# Allegro board ARTNET_NODE_2.brd
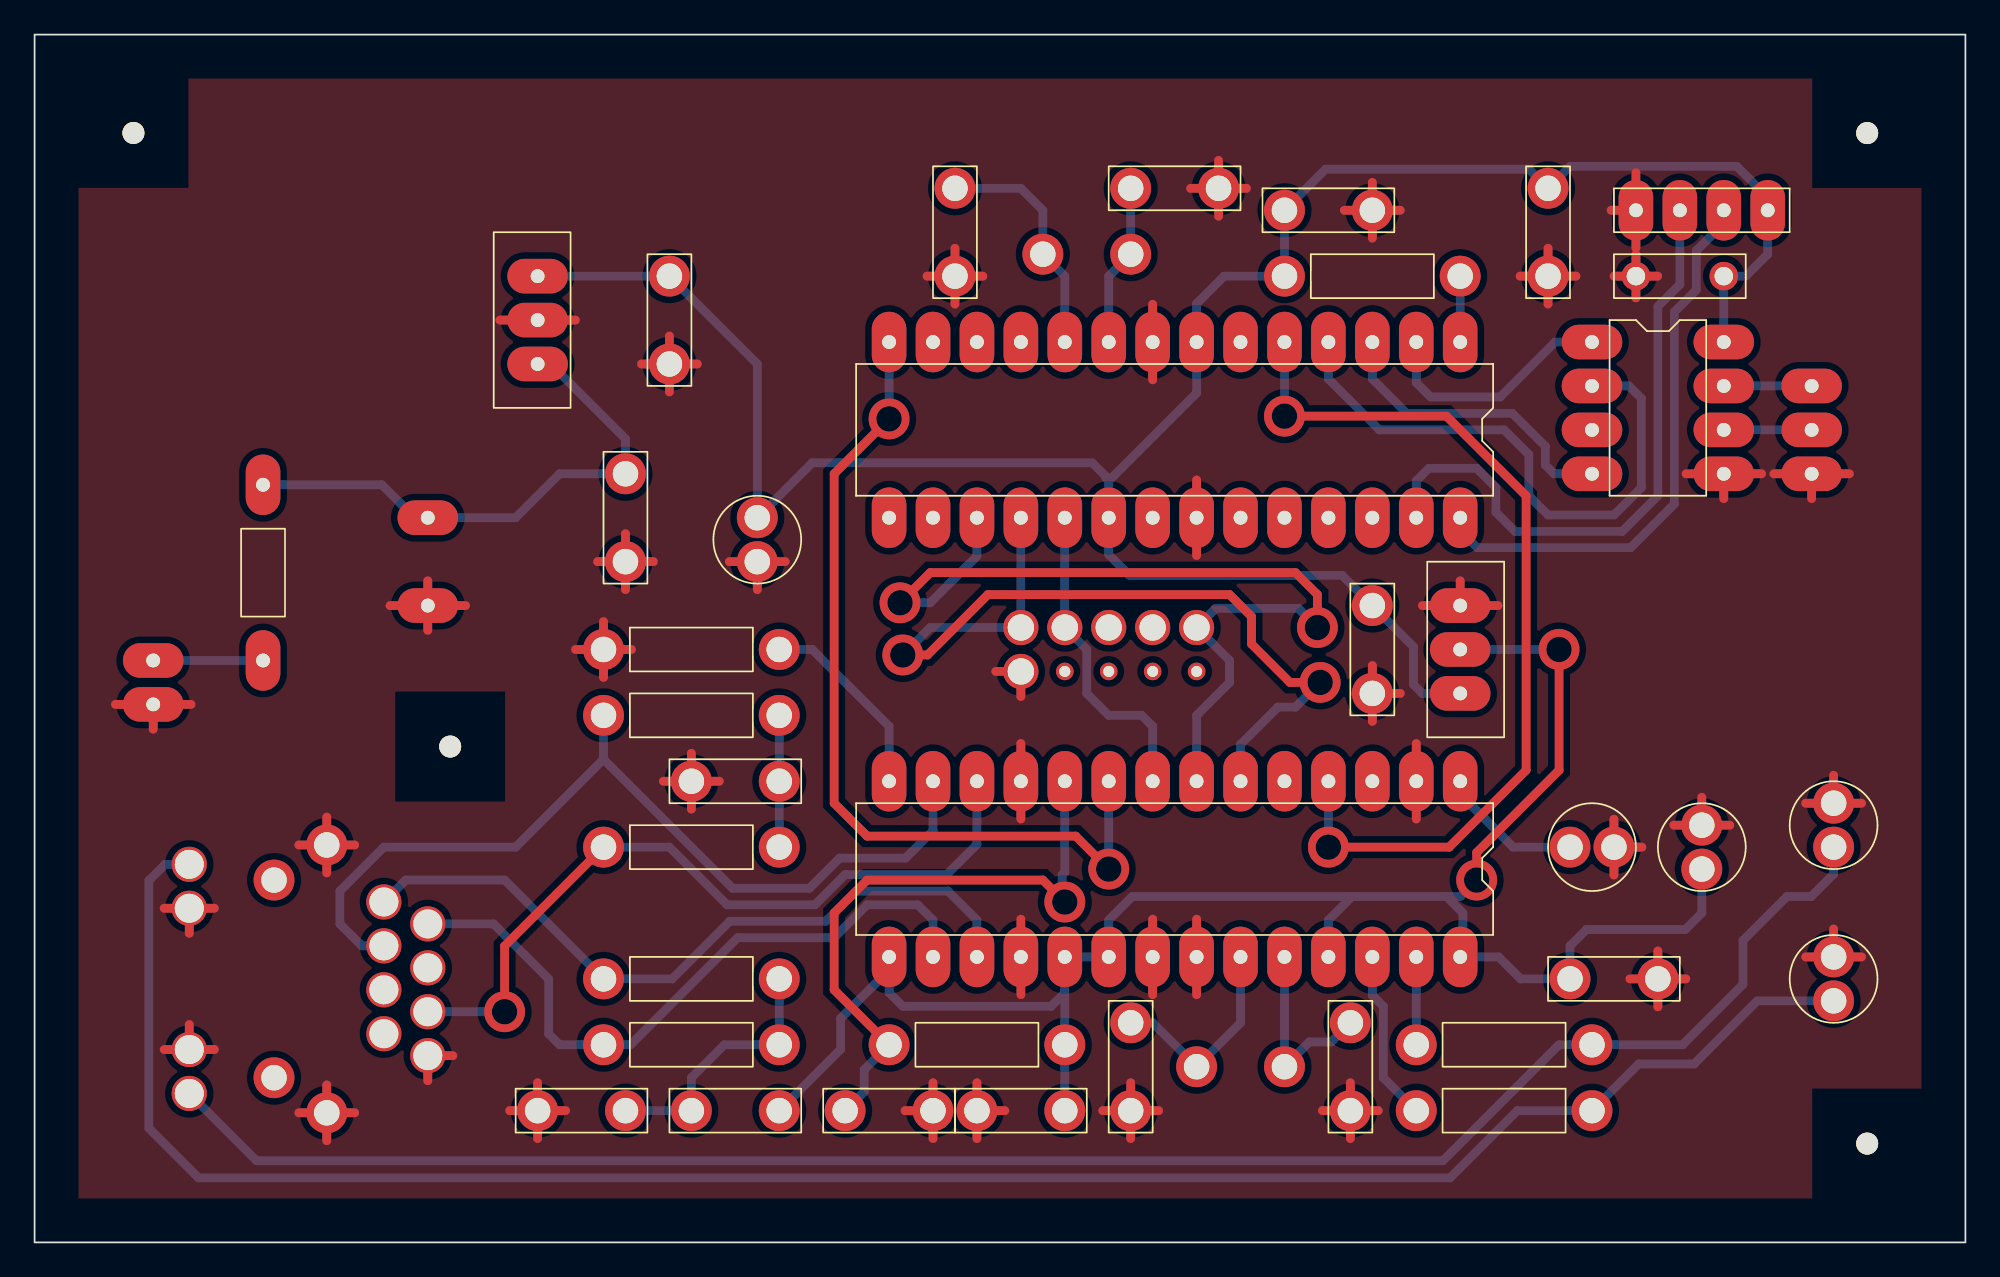
[diagram p0: board, top side]
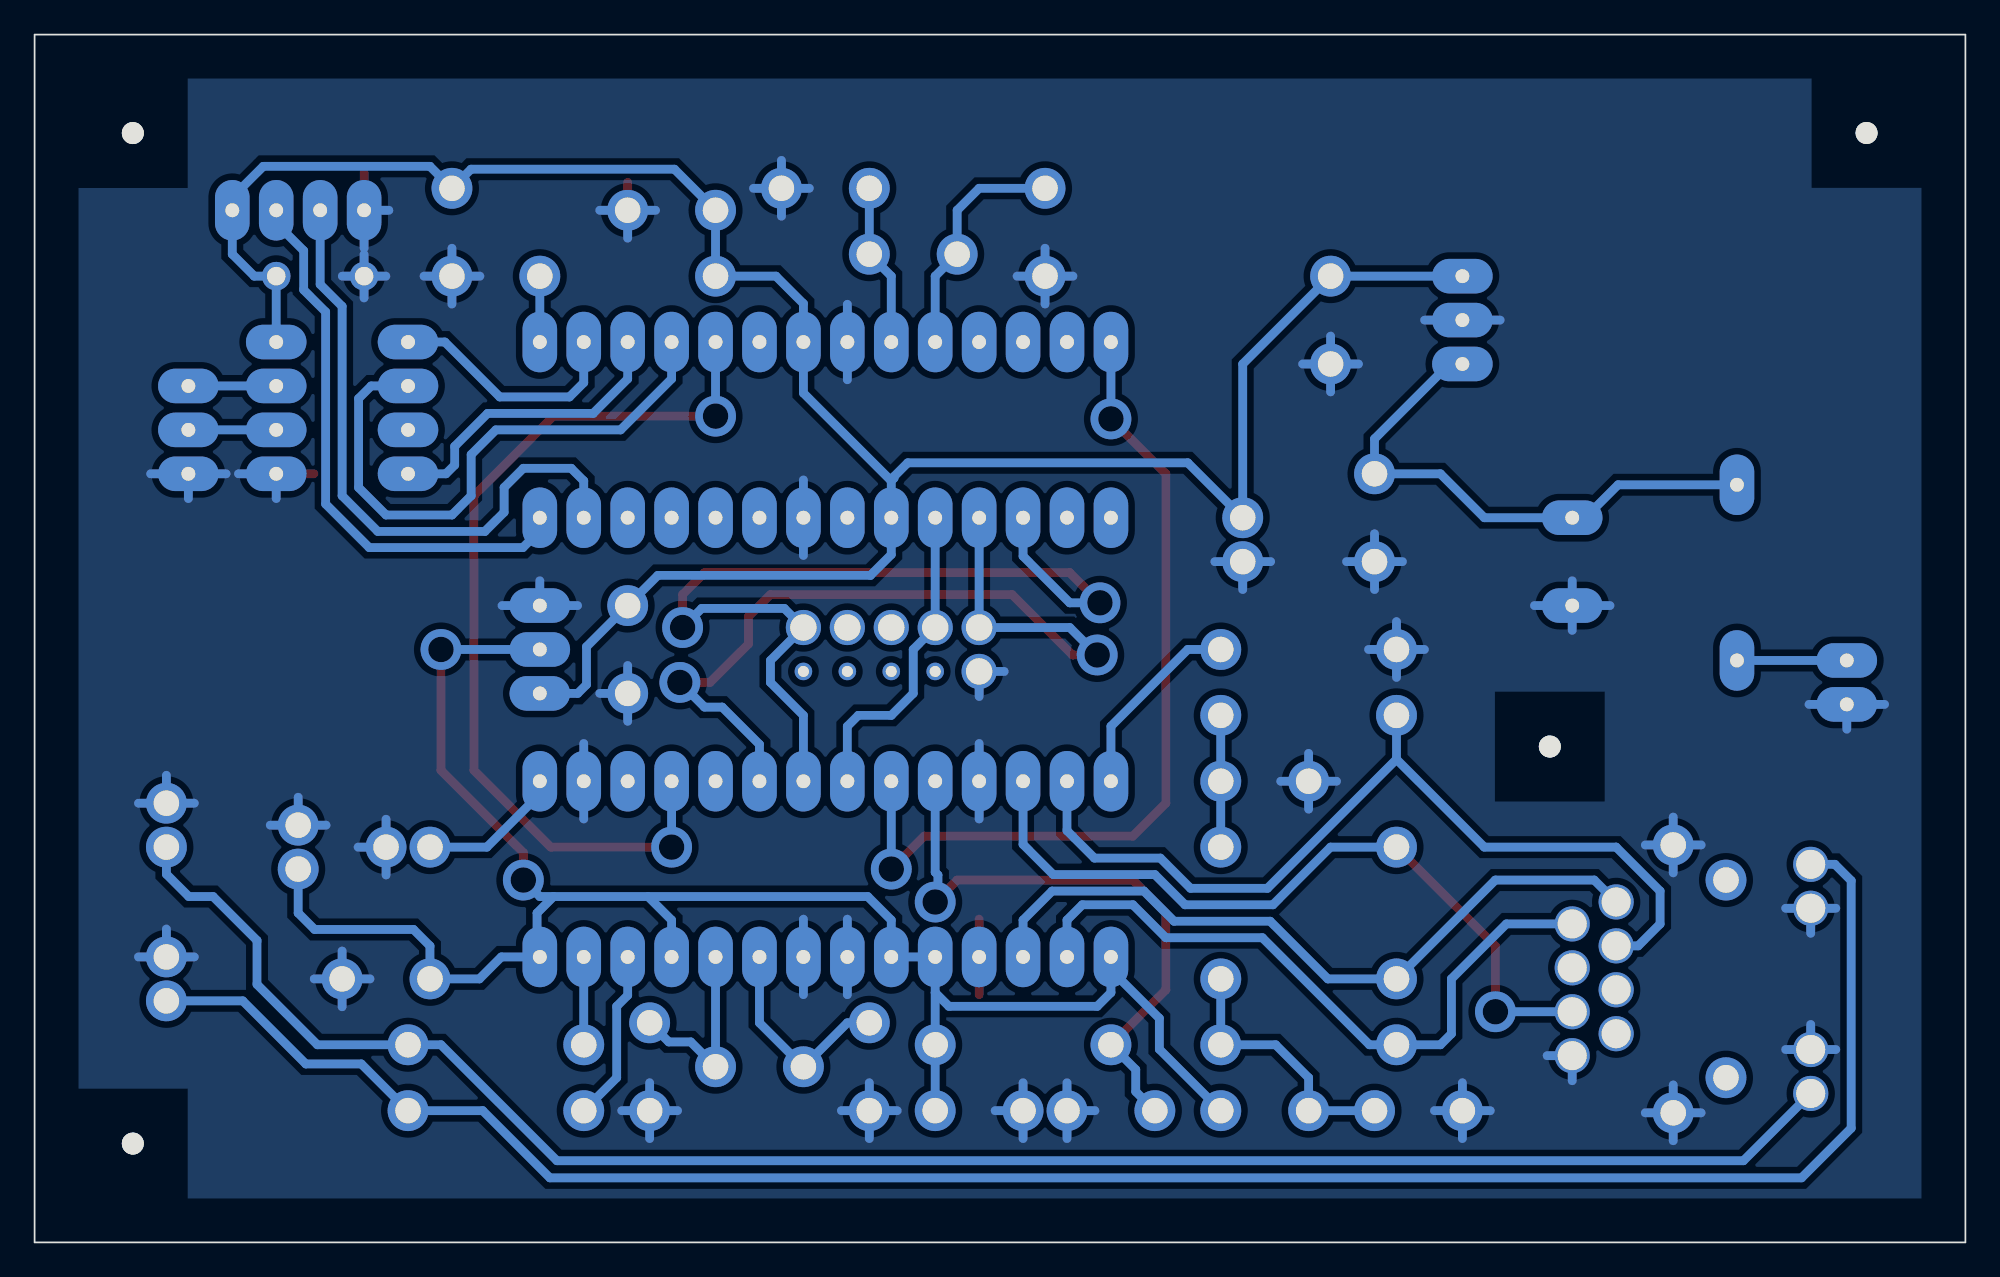
[diagram p1: board, bottom side, seen from below]

Outline 111.63 x 69.85 mm; copper layers: TOP, BOTTOM. Coordinates in mm from the lower left corner of the outline.
Outline path: rectangle 0,0 111.63,69.85

## Design rules (mm)
nets with their own width: min track width 0.508; nets DIR_IO ETH_CS ETH_INT GND MISO MOSI N23309 N23328 N23388 N23750 N23827 N23987 N24551 N24563 N24954 N24961 N25009 N25013 N26007 N26198 N27240 N28731 N29274 N29288 N30528 N30541 RESET RXD SCK TPIN+ TPIN- TPOUT+ TPOUT- TXD VCC_3V VCC_5V

## Placement (name value [footprint] x y rotation side)
C1  22p  [CAPCK06]  68.45 60.96 90 top
C2  22p  [CAPCK06]  53.21 55.88 0 top
C3  10u  [CAP196]  41.78 41.91 180 top
C4  100n  [CAPCK06]  87.5 55.88 0 top
C5  10u  [CAP196]  96.39 21.59 0 top
C6  10u  [CAP196]  88.77 22.86 270 top
C7  100n  [CAPCK06]  77.34 31.75 0 top
C11  220u  [CAP500]  22.73 39.37 270 top
C14  100n  [CAPCK06]  54.48 7.62 270 top
C15  100n  [CAPCK06]  36.7 50.8 0 top
C16  100n  [CAPCK06]  34.16 39.37 0 top
C17  22p  [CAPCK06]  63.37 12.7 180 top
C18  22p  [CAPCK06]  76.07 12.7 180 top
C22  10n  [CAPCK06]  37.97 26.67 270 top
C23  10n  [CAPCK06]  29.08 7.62 270 top
C24  100n  [CAPCK06]  51.94 7.62 90 top
C25  100n  [CAPCK06#2]  92.58 55.88 270 top
C26  100n  [CAPCK06]  77.34 59.69 90 top
C27  100n  [CAPCK06]  93.85 15.24 90 top
D1  1N4004  [DIO400]  13.21 43.81 180 top
J1  CON1  [RJ45]  13.84 15.24 90 top
J2  CON2  [FGCON3_1]  102.74 46.99 270 top
J3  CON3  [FGCON2_1]  6.86 32.38 270 top
J4  CON10  [FGCON10]  62.1 34.29 180 top
JP1  CON4  [JUMPER4]  92.58 59.69 0 top
L1  INDUCTOR  [CAPCK06]  43.05 7.62 90 top
LED2  LED  [CAP196]  104.01 25.4 180 top
LED3  LED  [CAP196]  104.01 16.51 180 top
NOREF  -  [unnamed]  105.95 64.15 0 top
NOREF#2  -  [unnamed]  24.03 28.68 0 top
NOREF#3  -  [unnamed]  5.71 64.16 0 top
NOREF#4  -  [unnamed]  105.95 5.72 0 top
R1  10k  [RES400]  72.26 55.88 270 top
R5  10k  [RES400]  59.56 11.43 90 top
R6  180  [RES400]  79.88 11.43 270 top
R7  180  [RES400]  79.88 7.62 270 top
R8  2k7  [RES400]  43.05 34.29 90 top
R9  47  [RES400]  32.89 30.48 270 top
R10  47  [RES400]  32.89 22.86 270 top
R11  47  [RES400]  43.05 15.24 90 top
R12  47  [RES400]  43.05 11.43 90 top
U1  Atmega328  [DIP28_4]  82.42 52.07 270 top
U2  LM7805/TO  [TO220AB]  29.08 50.8 270 top
U3  LM7833/TO  [TO220AB]  82.42 36.83 90 top
U4  75176  [DIP8_3]  90.04 52.07 0 top
U5  ENC28J60-DIL  [DIP28_4]  82.42 26.67 270 top
Y1  20MHz  [CRYS11MHZ]  58.29 57.15 0 top
Y2  25MHz  [CRYS11MHZ]  72.26 10.16 180 top

## Library data of the parts
C1 C2 C4 C7 C14-C18 C22-C27 = CAP NP: Tolerance: ***; User Part Number: ***
C3 C5 C6 = CAP: Tolerance: ***; User Part Number: ***
C11 = CAP
D1 = DIODE
J1 = CON16
J2 = CON3
J3 = CON2
J4 = CON10
JP1 = CON4: User Part Number: ***
L1 = INDUCTOR: Tolerance: ***; User Part Number: ***
LED2 LED3 = LED: Tolerance: ***; User Part Number: ***
R1 R5-R12 = RESISTOR: Tolerance: ***; User Part Number: ***
U1 = Atmega88_0: Tolerance: XXX; User Part Number: XXX
U2 = LM7805/TO_1
U3 = LM7805/TO_2
U4 = 75176_0: Tolerance: ***; User Part Number: ***
U5 = ENC28J60-DIL: Tolerance: XXX; User Part Number: XXX
Y1 Y2 = CRYSTAL: Tolerance: ***; User Part Number: ***

## Footprints (pads in the part's own frame, mm; a bottom-side part is the same pattern mirrored in y, then rotated)
CAP196
  round 2.362 hole 1.473: 1(0,0) 2(0,2.54)
CAP500
  oval 2x3.5 hole 0.8: 1(-2.54,0) 2(2.54,0)
CAPCK06
  round 2.362 hole 1.473: 1(0,0) 2(0,5.08)
CAPCK06#2
  round 1.651 hole 1.067: 1(0,0) 2(0,5.08)
CRYS11MHZ
  round 2.362 hole 1.473: 1(0,0) 2(5.08,0)
DIO400
  oval 2x3.5 hole 0.8: 1(0,0) 2(0,10.16)
DIP8_3
  oval 3.5x2 hole 0.8: 1(0,0) 2(0,-2.54) 3(0,-5.08) 4(0,-7.62) 5(7.62,-7.62) 6(7.62,-5.08) 7(7.62,-2.54) 8(7.62,0)
DIP28_4
  oval 3.5x2 hole 0.8: 1(0,0) 2(0,-2.54) 3(0,-5.08) 4(0,-7.62) 5(0,-10.16) 6(0,-12.7) 7(0,-15.24) 8(0,-17.78) 9(0,-20.32) 10(0,-22.86) 11(0,-25.4) 12(0,-27.94) 13(0,-30.48) 14(0,-33.02) 15(10.16,-33.02) 16(10.16,-30.48) 17(10.16,-27.94) 18(10.16,-25.4) 19(10.16,-22.86) 20(10.16,-20.32) 21(10.16,-17.78) 22(10.16,-15.24) 23(10.16,-12.7) 24(10.16,-10.16) 25(10.16,-7.62) 26(10.16,-5.08) 27(10.16,-2.54) 28(10.16,0)
FGCON2_1
  oval 2x3.5 hole 0.8: 1(-1.27,0) 2(1.27,0)
FGCON3_1
  oval 2x3.5 hole 0.8: 1(-2.54,0) 2(0,0) 3(2.54,0)
FGCON10
  round 2.032 hole 1.524: 1(-5.08,-1.27) 3(-2.54,-1.27) 5(0,-1.27) 7(2.54,-1.27) 9(5.08,-1.27) 10(5.08,1.27)
  round 1.016 hole 0.635: 2(-5.08,1.27) 4(-2.54,1.27) 6(0,1.27) 8(2.54,1.27)
JUMPER4
  oval 2x3.5 hole 0.8: 1(0,0) 2(2.54,0) 3(5.08,0) 4(7.62,0)
RES400
  round 2.362 hole 1.473: 1(0,0) 2(0,10.16)
RJ45
  round 2.032 hole 1.676: 1(4.45,-6.35) 2(3.18,-8.89) 3(1.91,-6.35) 4(0.64,-8.89) 5(-0.63,-6.35) 6(-1.9,-8.89) 7(-3.17,-6.35) 8(-4.44,-8.89) 9(6.625,4.9) 10(4.085,4.9) 11(-4.085,4.9) 12(-6.625,4.9)
  round 2.362 hole 1.473: 13(-7.745,-3.05) 14(7.745,-3.05) 15(-5.715,0) 16(5.715,0)
TO220AB
  oval 2x3.5 hole 0.8: 1(0,0) 2(-2.54,0) 3(-5.08,0)
unnamed
  round 1.27 hole 3.962 unplated: (0,0)

## Nets
GND: C1.1 C2.1 C3.2 C4.1 C5.2 C6.2 C7.1 C11.2 C14.1 C15.1 C16.1 C17.2 C18.2 C22.1 C23.1 C24.1 C25.1 C26.1 C27.1 J1.8 J1.10 J1.11 J1.13 J1.14 J2.3 J3.2 J4.10 JP1.1 LED2.1(CATHODE) LED3.1(CATHODE) R8.2 U1.8(GND0) U1.22(GND1) U2.2(GND) U3.1(GND) U4.5(GND) U5.2(VSS) U5.11(VSSRX) U5.18(VSSTX) U5.21(VSSPLL) U5.22(VSSOSC)
VCC_3V: C5.1 C14.2 C27.2 L1.1 R5.1 U3.2(VOUT) U5.15(VDDTX) U5.19(VDDRX) U5.20(VDDPLL) U5.25(VDDOSC) U5.28(VDD)
VCC_5V: C3.1 C4.2 C7.2 C15.2 C25.2 C26.2 JP1.4 R1.1 U1.7(VCC0) U1.20(AVCC) U2.3(VOUT) U3.3(VIN) U4.8(VCC)
DIR_IO: U1.4(PD2 (INT0)) U4.2(RE) U4.3(DE)
ETH_CS: U1.14(PB0) U5.9(CS)
ETH_INT: U1.5(PD3 (OC2B)) U5.4(INT)
MISO: J4.9 U1.18(PB4 (MISO)) U5.6(SO)
MOSI: J4.1 U1.17(PB3 (MOSI)) U5.7(SI)
RESET: J4.5
RXD: U1.2(PD0 (RXD)) U4.1(R)
SCK: J4.7 U1.19(PB5 (SCK)) U5.8(SCK)
TPIN+: J1.3 R9.1 U5.13(TPIN+)
TPIN-: J1.6 R10.1 U5.12(TPIN-)
TPOUT+: J1.1 R11.2 U5.17(TPOUT+)
TPOUT-: J1.2 R12.2 U5.16(TPOUT-)
TXD: U1.3(PD1 (TXD)) U4.4(D)
N23309: C1.2 U1.9(PB6 (XTAL1)) Y1.2
N23328: C2.2 U1.10(PB7 (XTAL2)) Y1.1
N23388: R1.2 U1.1(PC6 (RESET))
N23750: R8.1 U5.14(RBIAS)
N23827: C24.2 R5.2 U5.10(RESET)
N23987: C6.1 U5.1(VCAP)
N24551: C17.1 U5.23(OSC1) Y2.2
N24563: C18.1 U5.24(OSC2) Y2.1
N24954: R6.1 U5.27(LEDA)
N24961: R7.1 U5.26(LEDB)
N25009: J1.12 LED2.2(ANODE) R6.2
N25013: J1.9 LED3.2(ANODE) R7.2
N26007: C22.2 R9.2 R10.2
N26198: C23.2 L1.2 R11.1 R12.1
N27240: C11.1 C16.2 D1.1(K) U2.1(VIN)
N28731: D1.2(A) J3.1
N29274: J2.2 U4.6(A)
N29288: J2.1 U4.7(B)
N30528: JP1.3 U1.28(PC5 (ADC5))
N30541: JP1.2 U1.27(PC4 (ADC4))

Pads without a net: J1 4 5 7 15 16; J4 2 3 4 6 8; U1 6 11 12 13 15 16 21 23 24 25 26; U5 3 5

## Via types
v1: diameter 2.362, hole 1.473, TOP to BOTTOM, 12 vias
v2: diameter 0.61, hole 0.33, TOP to BOTTOM, 1 via

## Routing (per net, layer and track width the routed paths; a pad name or vN(x,y) marks a point on that pad's centre or on a via; arc(x,y) is an arc through that point)
GND: length 429
  TOP w0.508: 74.46,7.62 C18.2 ; C18.2 76.07,9.23 ; C18.2 77.69,7.62 ; C18.2 76.07,6.01 ; C16.1 34.16,40.98 ; C16.1 32.55,39.37 ; C16.1 34.16,37.76 ; C16.1 35.78,39.37 ; C15.1 36.7,52.41 ; C15.1 38.32,50.8 ; C15.1 36.7,49.19 ; C15.1 35.09,50.8 ; 31.28,34.29 R8.2 ; R8.2 32.89,32.68 ; R8.2 34.51,34.29 ; R8.2 32.89,35.9 ; 55.58,33.02 J4.10 57.02,31.57 ; 6.86,29.68 J3.2 ; J3.2 9.04,31.12 ; J3.2 4.68,31.12 ; C25.1 92.58,57.14 ; C25.1 93.84,55.88 ; C25.1 91.33,55.88 ; C25.1 92.58,54.62 ; 27.47,7.62 C23.1 ; C23.1 30.7,7.62 ; C23.1 29.08,6.01 ; C23.1 29.08,9.23 ; JP1.1 92.58,61.87 ; JP1.1 92.58,57.51 ; JP1.1 91.15,59.69 ; 80.24,36.83 U3.1 ; U3.1 84.6,36.83 ; U3.1 82.42,38.26 ; 79.88,28.85 U5.2 79.88,24.49 ; 64.64,54.25 U1.8 64.64,49.89 ; J1.14 18.51,22.98 ; J1.14 15.28,22.98 ; J1.14 16.89,24.6 ; J1.14 16.89,21.37 ; 57.02,18.69 U5.18 57.02,14.33 ; J1.10 10.39,19.33 ; J1.10 7.5,19.33 ; J1.10 8.94,17.88 ; 102.4,16.51 LED3.1 ; LED3.1 104.01,18.12 ; LED3.1 105.63,16.51 ; C24.1 51.94,9.23 ; C24.1 50.33,7.62 ; C24.1 51.94,6.01 ; 41.78,37.76 C3.2 ; C3.2 40.17,39.37 ; C3.2 43.4,39.37 ; LED2.1 104.01,27.01 ; LED2.1 105.63,25.4 ; LED2.1 102.4,25.4 ; J1.11 8.94,12.6 ; J1.11 7.5,11.15 ; J1.11 10.39,11.15 ; C17.2 63.37,9.23 ; C17.2 61.76,7.62 ; C17.2 64.99,7.62 ; C17.2 63.37,6.01 ; 87.5,54.27 C4.1 ; C4.1 87.5,57.49 ; C4.1 89.12,55.88 ; C4.1 85.89,55.88 ; 67.18,14.33 U5.22 67.18,18.69 ; 22.73,35.4 C11.2 ; C11.2 24.91,36.83 ; C11.2 20.55,36.83 ; C11.2 22.73,38.26 ; 92.24,15.24 C27.1 ; C27.1 95.47,15.24 ; C27.1 93.85,13.63 ; C27.1 93.85,16.85 ; 54.48,6.01 C14.1 ; C14.1 54.48,9.23 ; C14.1 56.1,7.62 ; 22.73,9.35 J1.8 24.18,10.8 ; 64.64,14.33 U5.21 64.64,18.69 ; U4.5 99.84,44.45 ; U4.5 95.48,44.45 ; U4.5 97.66,43.02 ; C1.1 68.45,62.57 ; C1.1 66.84,60.96 ; C1.1 70.07,60.96 ; C1.1 68.45,59.35 ; 53.21,54.27 C2.1 ; C2.1 51.6,55.88 ; C2.1 53.21,57.49 ; C2.1 54.83,55.88 ; 37.97,25.06 C22.1 ; C22.1 36.36,26.67 ; C22.1 39.59,26.67 ; C22.1 37.97,28.28 ; C7.1 77.34,33.36 ; C7.1 78.96,31.75 ; C7.1 77.34,30.14 ; 102.74,43.02 J2.3 ; J2.3 100.56,44.45 ; J2.3 104.92,44.45 ; J1.13 18.51,7.5 ; J1.13 16.89,5.88 ; J1.13 16.89,9.11 ; J1.13 15.28,7.5 ; 77.34,58.08 C26.1 ; C26.1 75.73,59.69 ; C26.1 77.34,61.3 ; C26.1 78.96,59.69 ; 26.9,53.34 U2.2 31.26,53.34 ; C5.2 96.39,25.74 ; C5.2 98.01,24.13 ; C5.2 94.78,24.13 ; C6.2 92.93,22.86 ; C6.2 91.31,24.47 ; C6.2 91.31,21.25 ; 57.02,28.85 U5.11 57.02,24.49 ; 67.18,39.73 U1.22 67.18,44.09
  BOTTOM w0.508: 68.45,59.35 C1.1 ; C1.1 70.07,60.96 ; C1.1 68.45,62.57 ; C1.1 66.84,60.96 ; 51.6,55.88 C2.1 ; C2.1 53.21,54.27 ; C2.1 53.21,57.49 ; C2.1 54.83,55.88 ; U3.1 82.42,38.26 ; U3.1 80.24,36.83 ; U3.1 84.6,36.83 ; C14.1 54.48,9.23 ; C14.1 56.1,7.62 ; C14.1 54.48,6.01 ; 92.58,54.62 C25.1 ; C25.1 92.58,57.14 ; C25.1 91.33,55.88 ; C25.1 93.84,55.88 ; LED3.1 105.63,16.51 ; LED3.1 104.01,18.12 ; LED3.1 102.4,16.51 ; 57.02,31.57 J4.10 55.58,33.02 ; 57.02,28.85 U5.11 57.02,24.49 ; 99.84,44.45 U4.5 97.66,43.02 ; LED2.1 105.63,25.4 ; LED2.1 104.01,27.01 ; LED2.1 102.4,25.4 ; 67.18,44.09 U1.22 67.18,39.73 ; 27.47,7.62 C23.1 ; C23.1 29.08,6.01 ; C23.1 30.7,7.62 ; C23.1 29.08,9.23 ; 6.86,29.68 J3.2 ; J3.2 9.04,31.12 ; J3.2 4.68,31.12 ; 31.28,34.29 R8.2 ; R8.2 32.89,32.68 ; R8.2 32.89,35.9 ; R8.2 34.51,34.29 ; 16.89,21.37 J1.14 ; J1.14 18.51,22.98 ; J1.14 16.89,24.6 ; J1.14 15.28,22.98 ; 77.34,58.08 C26.1 ; C26.1 75.73,59.69 ; C26.1 78.96,59.69 ; 20.55,36.83 C11.2 ; C11.2 22.73,35.4 ; C11.2 22.73,38.26 ; C11.2 24.91,36.83 ; 15.28,7.5 J1.13 ; J1.13 16.89,5.88 ; J1.13 18.51,7.5 ; J1.13 16.89,9.11 ; C22.1 39.59,26.67 ; C22.1 37.97,28.28 ; C22.1 36.36,26.67 ; C22.1 37.97,25.06 ; 8.94,17.88 J1.10 ; J1.10 7.5,19.33 ; J1.10 10.39,19.33 ; 50.33,7.62 C24.1 ; C24.1 51.94,6.01 ; C24.1 51.94,9.23 ; 32.55,39.37 C16.1 ; C16.1 35.78,39.37 ; C16.1 34.16,37.76 ; C16.1 34.16,40.98 ; 31.26,53.34 U2.2 26.9,53.34 ; 85.89,55.88 C4.1 ; C4.1 89.12,55.88 ; C4.1 87.5,54.27 ; C4.1 87.5,57.49 ; C27.1 95.47,15.24 ; C27.1 92.24,15.24 ; C27.1 93.85,16.85 ; C27.1 93.85,13.63 ; J1.11 8.94,12.6 ; J1.11 10.39,11.15 ; J1.11 7.5,11.15 ; C17.2 63.37,9.23 ; C17.2 64.99,7.62 ; C17.2 63.37,6.01 ; C17.2 61.76,7.62 ; 74.46,7.62 C18.2 ; C18.2 76.07,9.23 ; C18.2 76.07,6.01 ; C18.2 77.69,7.62 ; 67.18,14.33 U5.22 67.18,18.69 ; 91.31,21.25 C6.2 ; C6.2 91.31,24.47 ; C6.2 92.93,22.86 ; 77.34,30.14 C7.1 ; C7.1 78.96,31.75 ; C7.1 77.34,33.36 ; 64.64,49.89 U1.8 64.64,54.25 ; C5.2 96.39,25.74 ; C5.2 94.78,24.13 ; C5.2 98.01,24.13 ; C15.1 38.32,50.8 ; C15.1 36.7,52.41 ; C15.1 36.7,49.19 ; C15.1 35.09,50.8 ; J2.3 104.92,44.45 ; J2.3 102.74,43.02 ; J2.3 100.56,44.45 ; 64.64,18.69 U5.21 64.64,14.33 ; 41.78,37.76 C3.2 ; C3.2 43.4,39.37 ; C3.2 40.17,39.37 ; 92.58,57.51 JP1.1 91.15,59.69 ; 24.18,10.8 J1.8 22.73,9.35 ; 79.88,28.85 U5.2 79.88,24.49
VCC_3V: length 108.2
  TOP w0.508: v1(88.14,34.29) 88.14,27.3 83.38,22.54 v1(83.38,20.96)
  BOTTOM w0.508: 76.16,20 74.8,18.64 U5.25 ; 76.16,20 81.63,20 ; 76.16,20 63.46,20 62.1,18.64 U5.20 U5.19 59.56,14.45 ; 59.56,14.45 58.77,13.65 50.2,13.65 49.4,14.45 49.4,15.76 ; 59.56,14.45 R5.1 C14.2 ; 49.4,15.76 U5.15 ; 49.4,15.76 46.6,12.96 46.6,11.17 L1.1 ; v1(88.14,34.29) U3.2 ; 81.63,20 82.58,19.05 82.58,16.67 U5.28 84.65,16.51 85.92,15.24 C27.2 88.77,17.14 89.73,18.1 95.44,18.1 96.39,19.05 C5.1 ; 81.63,20 82.42,20 v1(83.38,20.96)
VCC_5V: length 137.7
  BOTTOM w0.508: 62.1,44.04 61.94,44.2 61.94,44.29 61.15,45.08 44.96,45.08 C3.1 41.78,50.8 C15.2 U2.3 ; 62.1,44.04 U1.20 62.1,39.78 63.31,38.58 75.6,38.58 C7.2 79.72,34.45 79.72,32.26 80.23,31.75 U3.3 ; 62.1,44.04 67.18,49.12 U1.7 67.18,54.29 68.77,55.88 R1.1 C26.2 74.64,62.06 86.4,62.06 C4.2 88.77,62.23 98.41,62.23 100.2,60.44 JP1.4 100.2,57.15 98.93,55.88 C25.2 U4.8
DIR_IO: length 33.8
  BOTTOM w0.508: U1.4 74.8,49.94 77.75,46.99 84.96,46.99 86.39,45.56 86.39,43.18 87.5,42.07 91.31,42.07 92.9,43.66 92.9,48.8 92.17,49.53 U4.2
ETH_CS: length 50.5
  TOP w0.508: v1(49.4,47.62) 46.23,44.45 46.23,25.4 48.13,23.5 60.2,23.5 v1(62.1,21.59)
  BOTTOM w0.508: v1(62.1,21.59) U5.9 ; U1.14 v1(49.4,47.62)
ETH_INT: length 53.1
  TOP w0.508: v1(74.8,22.86) 81.79,22.86 86.23,27.3 86.23,43.18 81.63,47.78 v1(72.26,47.78)
  BOTTOM w0.508: v1(74.8,22.86) U5.4 ; U1.5 v1(72.26,47.78)
MISO: length 50.7
  TOP w0.508: v1(50.2,33.97) 51.63,33.97 55.12,37.46 69.09,37.46 70.36,36.2 70.36,34.61 72.58,32.38 v1(74.33,32.38)
  BOTTOM w0.508: U5.6 69.72,28.8 71.88,30.96 72.9,30.96 v1(74.33,32.38) ; U1.18 J4.9 51.78,35.56 v1(50.2,33.97)
MOSI: length 53.4
  TOP w0.508: v1(74.17,35.56) 74.17,37.46 72.9,38.73 51.78,38.73 v1(50.04,36.99)
  BOTTOM w0.508: v1(74.17,35.56) 73.06,36.66 68.29,36.66 J4.1 69.09,33.66 69.09,32.38 67.18,30.48 U5.7 ; v1(50.04,36.99) 51.78,36.99 54.48,39.69 U1.17
RXD: length 14.2
  BOTTOM w0.508: U4.1 87.91,52.07 84.74,48.89 80.71,48.89 79.88,49.72 U1.2
SCK: length 18.5
  BOTTOM w0.508: U5.8 64.64,29.84 64.01,30.48 62.1,30.48 60.83,31.75 60.83,34.29 J4.7 U1.19
TPIN+: length 52.3
  BOTTOM w0.508: 32.89,27.94 R9.1 ; 32.89,27.94 40.35,20.48 44.8,20.48 46.55,22.23 50.36,22.23 51.94,23.81 U5.13 ; 32.89,27.94 27.81,22.86 20.19,22.86 17.65,20.32 17.65,18.41 18.92,17.15 J1.3
TPIN-: length 44.4
  TOP w0.508: v1(27.17,13.34) 27.17,17.14 R10.1
  BOTTOM w0.508: J1.6 v1(27.17,13.34) ; U5.12 54.48,23.02 52.74,21.27 46.86,21.27 45.12,19.53 40.04,19.53 36.7,22.86 R10.1
TPOUT+: length 42.1
  BOTTOM w0.508: J1.1 21.46,20.96 27.18,20.96 R11.2 36.86,15.24 40.2,18.57 45.75,18.57 47.5,20.32 52.8,20.32 54.48,18.64 U5.17
TPOUT-: length 39.8
  BOTTOM w0.508: J1.2 26.54,18.42 29.72,15.24 29.72,12.06 30.35,11.43 R12.2 34.46,11.43 40.65,17.62 46.23,17.62 48.13,19.53 51.06,19.53 51.94,18.64 U5.16
TXD: length 17.7
  BOTTOM w0.508: U1.3 77.34,49.94 79.34,47.94 85.44,47.94 87.34,46.04 87.34,44.96 87.85,44.45 U4.4
N23309: length 9.4
  BOTTOM w0.508: U1.9 62.1,55.88 Y1.2 C1.2
N23328: length 13.8
  BOTTOM w0.508: U1.10 59.56,55.88 Y1.1 58.29,59.69 57.02,60.96 C2.2
N23388: length 3.8
  BOTTOM w0.508: R1.2 U1.1
N23750: length 11.4
  BOTTOM w0.508: R8.1 44.96,34.29 49.4,29.84 U5.14
N23827: length 35.6
  TOP w0.508: R5.2 46.23,14.61 46.23,19.05 48.13,20.96 58.29,20.96 v1(59.56,19.68)
  BOTTOM w0.508: C24.2 47.97,8.72 47.97,9.99 R5.2 ; U5.10 59.56,21.41 59.4,21.25 59.4,19.84 v1(59.56,19.68)
N23987: length 8.4
  BOTTOM w0.508: C6.1 85.48,22.86 82.42,25.92 U5.1
N24551: length 12.3
  BOTTOM w0.508: v2(63.37,12.7) 64.64,12.7 Y2.2 69.72,12.7 U5.23
N24563: length 11.2
  BOTTOM w0.508: U5.24 Y2.1 73.7,11.6 74.97,11.6 C18.1
N24954: length 5.1
  BOTTOM w0.508: R6.1 U5.27
N24961: length 9.9
  BOTTOM w0.508: R7.1 77.98,9.53 77.98,13.65 77.34,14.29 U5.26
N25009: length 106.6
  BOTTOM w0.508: J1.12 12.83,4.72 81.43,4.72 88.14,11.43 R6.2 95.28,11.43 98.77,14.92 98.77,17.46 101.31,20 102.72,20 104.01,21.3 LED2.2
N25013: length 119.9
  BOTTOM w0.508: J1.9 7.55,21.87 6.6,20.92 6.6,6.6 9.47,3.73 81.84,3.73 85.73,7.62 R7.2 92.74,10.32 95.95,10.32 99.6,13.97 LED3.2
N26007: length 7.6
  BOTTOM w0.508: R9.2 C22.2 R10.2
N26198: length 15.4
  BOTTOM w0.508: C23.2 L1.2 37.97,9.53 39.88,11.43 R12.1 R11.1
N27240: length 31.7
  BOTTOM w0.508: D1.1 20.08,43.81 21.98,41.91 C11.1 27.81,41.91 30.35,44.45 C16.2 34.16,46.47 29.83,50.8 U2.1
N28731: length 6.4
  BOTTOM w0.508: J3.1 D1.2
N29274: length 5.1
  BOTTOM w0.508: U4.6 J2.2
N29288: length 5.1
  BOTTOM w0.508: U4.7 J2.1
N30528: length 32.8
  BOTTOM w0.508: U1.28 82.42,41.16 83.4,40.18 92.28,40.18 94.81,42.7 94.81,53.82 96.08,55.09 96.08,57.35 97.66,58.94 JP1.3
N30541: length 36.6
  BOTTOM w0.508: U1.27 79.88,44.04 80.61,44.77 83.38,44.77 84.49,43.66 84.49,42.23 85.6,41.12 91.79,41.12 93.85,43.18 93.85,54.13 95.12,55.4 JP1.2

## Copper pours and planes (outline as drawn; the poured copper is in the pictures)
GND on TOP, BOTTOM: 2.54,2.54 2.54,67.31 109.09,67.31 109.09,2.54
